# EAGLE board gardencore (EAGLE 6.5.0)
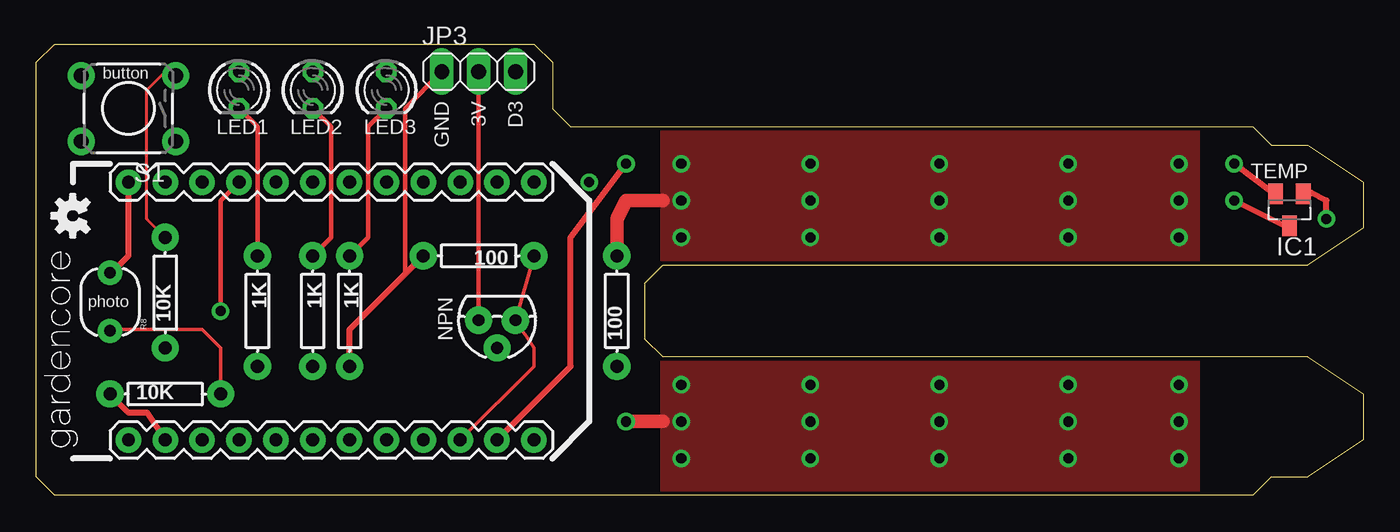
[diagram p0: board, top side]
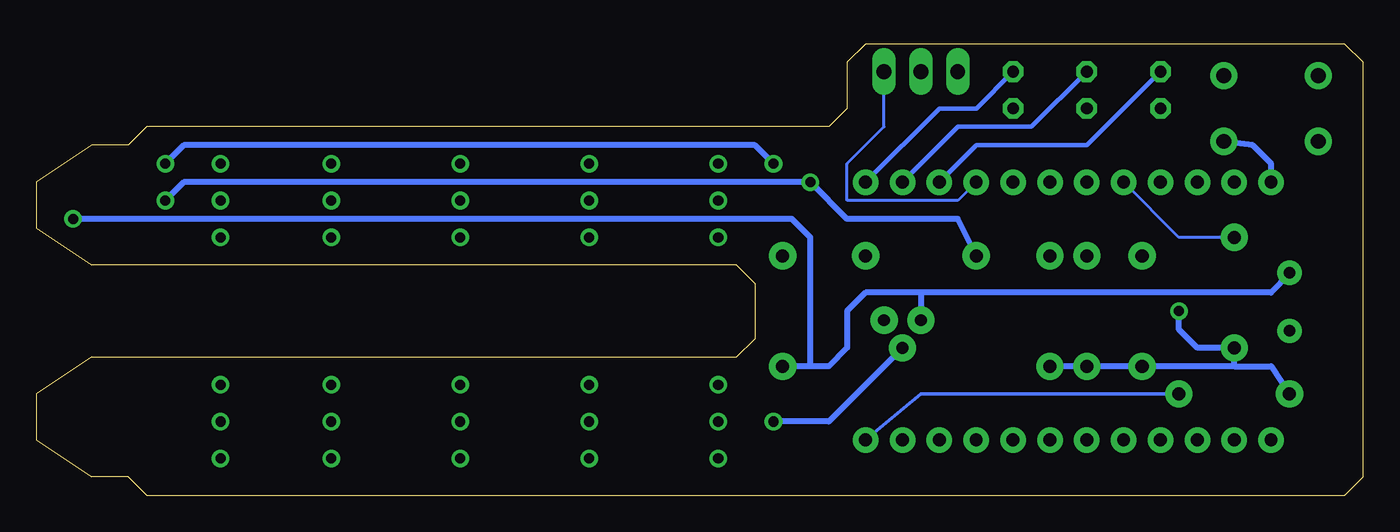
[diagram p1: board, bottom side, seen from below]

Size 91.44 x 31.11 mm. Coordinates in mm from the lower left corner, seen from the top.
Outline: 41.91,14.6 41.91,10.8 43.18,9.52 87.63,9.52 91.44,6.98 91.44,3.81 87.63,1.27 85.09,1.27 83.82,0 1.27,0 0,1.27 0,29.84 1.27,31.11 34.29,31.11 35.56,29.84 35.56,26.67 36.83,25.4 83.82,25.4 85.09,24.13 87.63,24.13 91.44,21.59 91.44,18.41 87.63,15.88 43.18,15.88 41.91,14.6
Copper layers (1*16): Top 0.035mm / dielectric 1.5mm / Bottom 0.035mm
Design rules "SparkFun": minimum track width 8mil, minimum drill 20mil, track to track 8mil, track to pad 8mil, pad to pad 8mil, via to via 8mil, smd to smd 8mil, copper to edge 10mil, drill to drill 8mil, minimum pad ring 12mil, minimum via ring 10mil, stop-mask expansion 4mil, vias tented up to drill 25mil, thermal gap 10mil

## Footprints (pad centres in the part's own frame; a part is rotated, then mirrored left to right if it is on the bottom)
SOT23 = smd 1 x 1.4: 1 -0.95,-1.1; 2 0.95,-1.1; 3 0,1.1
1X12-SMALL-PADS = drill 0.889 pad 1.753: 1 0,0; 2 2.54,0; 3 5.08,0; 4 7.62,0; 5 10.16,0; 6 12.7,0; 7 15.24,0; 8 17.78,0; 9 20.32,0; 10 22.86,0; 11 25.4,0; 12 27.94,0
1X03 = drill 1.016 long: 1 -2.54,0; 2 0,0; 3 2.54,0
LED3MM = drill 0.813 octagon: A -1.27,0; K 1.27,0
TO-92 = drill 0.813 pad 1.88: 1 -1.27,0; 2 0,1.905; 3 1.27,0
PHOTOCELL = drill 0.8 pad 1.676: 1 -2,0; 2 2,0
AXIAL-0.3 = drill 0.9 pad 1.88: P$1 -3.81,0; P$2 3.81,0
TACTILE-PTH = drill 1.016 pad 1.88: 1 -3.251,2.261; 2 3.251,2.261; 3 -3.251,-2.261; 4 3.251,-2.261

## Placement (x,y rotation side)
IC1  LM50  [SOT23]  86.36,19.69 180 top
JP1  M12PTH  [1X12-SMALL-PADS]  6.35,3.81 0 top
JP2  M12PTH  [1X12-SMALL-PADS]  6.35,21.59 0 top
JP3  [1X03]  30.48,29.21 0 top
LED1  green  [LED3MM]  13.97,27.94 270 top
LED2  blue  [LED3MM]  19.05,27.94 270 top
LED3  yellow  [LED3MM]  24.13,27.94 270 top
Q1  [TO-92]  31.75,12.06 180 top
R1  PHOTOCELLPTH  [PHOTOCELL]  5.08,13.34 90 top
R2  10K  [AXIAL-0.3]  8.89,6.98 0 top
R3  100  [AXIAL-0.3]  40,12.7 90 top
R4  1K  [AXIAL-0.3]  15.24,12.7 270 top
R5  1K  [AXIAL-0.3]  19.05,12.7 270 top
R6  1K  [AXIAL-0.3]  21.59,12.7 270 top
R7  100  [AXIAL-0.3]  30.48,16.51 180 top
R8  10K  [AXIAL-0.3]  8.89,13.97 90 top
S1  [TACTILE-PTH]  6.35,26.67 180 top
U$1  [OSHW-LOGO-S]  2.51,19.27 90 top

## Library data of the parts
IC1 = linear
JP1 JP2 = Spark
JP3 = pinhead
LED1-LED3 = led
Q1 = SparkFun-DiscreteSemi
R1 = SparkFun-Sensors
R2-R8 = SparkFun-Passives
S1 = SparkFun-Electromechanical
U$1 = SparkFun-Aesthetics

## Nets
!RST: JP2.2
+3V3: IC1.1 JP2.1 JP3.2 Q1.3 R1.2 R3.P$1 S1.1
A0: JP1.12 R1.1 R2.P$2
A1: IC1.2 JP1.11
A3: JP1.9
A4: JP1.8
A5: JP1.7
A6: JP1.6
A7: JP1.5
D0: JP2.12 LED3.A
D1: JP2.11 LED2.A
D2: JP2.10 LED1.A
D3: JP2.9 JP3.3
D4: JP2.8
D5: JP2.7
D6: JP2.6
D7: JP2.5 R8.P$2 S1.3
GND: IC1.3 JP1.2 JP2.4 JP3.1 R2.P$1 R4.P$2 R5.P$2 R6.P$2 R7.P$2 R8.P$1
N$1: R3.P$2
N$4: LED3.K R6.P$1
N$5: LED2.K R5.P$1
N$6: LED1.K R4.P$1
N$7: JP1.10 Q1.1 R7.P$1
N$8: Q1.2
RAW [vcc]: JP1.1
RX: JP1.4
TX: JP1.3
VDDA: JP2.3

## Tracks (layer width: path | path; a pad name or v marks a point on that pad's centre or on a via)
+3V3  (via drill 0.7)
  Top 0.254: 5.08,15.24 R1.2
  Top 0.305: IC1.1 87.31,20.83 87.88,20.83 | Q1.3 JP3.2
  Top 0.406: 5.08,15.24 6.35,16.51 JP2.1 | v88.9,19.05 88.9,20.32 87.88,20.83 87.63,20.95
  Bottom 0.254: 5.08,15.24 R1.2
  Bottom 0.305: 9.65,24.38 9.65,24.41 S1.1
  Bottom 0.406: 38.1,8.89 36.83,8.89 35.56,10.16 35.56,12.7 34.29,13.97 30.48,13.97 | 38.1,8.89 R3.P$1 | 5.08,15.24 6.35,13.97 30.48,13.97 | 30.48,13.97 Q1.3 | 38.1,8.89 38.1,17.78 39.37,19.05 v88.9,19.05 | JP2.1 6.35,22.86 7.62,24.13 9.65,24.38
A0
  Top 0.254: R2.P$2 12.7,10.16 11.43,11.43 5.08,11.43 R1.1
  Bottom 0.254: JP1.12 30.48,6.98 R2.P$2
A1  (via drill 0.7)
  Top 0.305: 85.09,20.95 85.09,20.78 IC1.2
  Top 0.406: JP1.11 36.83,8.89 36.83,17.78 v40.64,22.86 | v82.55,22.86 85.09,20.95
  Bottom 0.406: v40.64,22.86 41.91,24.13 81.28,24.13 v82.55,22.86
D0
  Bottom 0.305: LED3.A 26.67,26.67 29.21,26.67 JP2.12
D1
  Bottom 0.305: JP2.11 27.94,25.4 22.86,25.4 LED2.A
D2
  Bottom 0.305: LED1.A 19.05,24.13 26.67,24.13 JP2.10
D3
  Bottom 0.203: JP3.3 33.02,25.4 35.56,22.86 35.56,20.32 27.94,20.32 JP2.9
D7
  Top 0.203: R8.P$2 7.62,19.05 7.62,27.94 8.89,29.21 S1.3
  Bottom 0.203: JP2.5 12.7,17.78 R8.P$2
GND  (via drill 0.7)
  Top 0.305: JP2.4 12.7,20.32 v12.7,12.7 | 86.36,18.41 IC1.3 | JP3.1 25.4,26.67 25.4,15.24
  Top 0.406: R2.P$1 6.35,5.71 7.62,5.71 JP1.2 | R7.P$2 25.4,15.24 21.59,11.43 R6.P$2 | v82.55,20.32 86.36,18.41
  Bottom 0.406: R2.P$1 6.35,8.89 8.89,8.89 | v82.55,20.32 81.28,21.59 v38.1,21.59 35.56,19.05 27.94,19.05 R7.P$2 | 8.89,8.89 R8.P$1 11.43,10.16 12.7,11.43 v12.7,12.7 | 8.89,8.89 R4.P$2 R5.P$2 R6.P$2
N$1  (via drill 0.7, 0.7 pad 0.7)
  Top 0.914: R3.P$2 40,19.05 40.64,20.32 43.18,20.32
  other vias: 44.45,22.86 44.45,20.32 44.45,17.78 53.34,22.86 53.34,20.32 53.34,17.78 62.23,22.86 62.23,20.32 62.23,17.78 71.12,22.86 71.12,20.32 71.12,17.78 78.74,22.86 78.74,20.32 78.74,17.78
  pour Top: 43.18,15.88 80.01,15.88 80.01,25.4 43.18,25.4
N$4
  Top 0.305: R6.P$1 22.86,17.78 22.86,25.4 LED3.K
N$5
  Top 0.305: LED2.K 20.32,25.4 20.32,17.78 R5.P$1
N$6
  Top 0.305: LED1.K 15.24,25.4 R4.P$1
N$7
  Top 0.254: JP1.10 34.29,8.89 34.29,10.16 Q1.1 R7.P$1
N$8  (via drill 0.7)
  Top 0.914: v40.64,5.08 43.18,5.08
  Bottom 0.406: Q1.2 36.83,5.08 v40.64,5.08
  other vias: 44.45,7.62 44.45,5.08 44.45,2.54 53.34,7.62 53.34,5.08 53.34,2.54 62.23,7.62 62.23,5.08 62.23,2.54 71.12,7.62 71.12,5.08 71.12,2.54 78.74,7.62 78.74,5.08 78.74,2.54
  pour Top: 43.18,9.52 43.18,0 80.01,0 80.01,9.52

## Text on the board
tPlace: button | GND | 3V | D3 | LED1 | LED2 | LED3 | TEMP | photo | NPN